# Altium PCB SZ.PcbDoc
Units mil, origin at the board's own origin, x right, y up, seen from the top; angles counter-clockwise.
Board outline 1290 x 1133 mil, 2 copper layers (Top Layer, Bottom Layer); 47 components, 54 nets, 167 pads, 31 vias.
Unrouted connection lines stored in the file: 6.
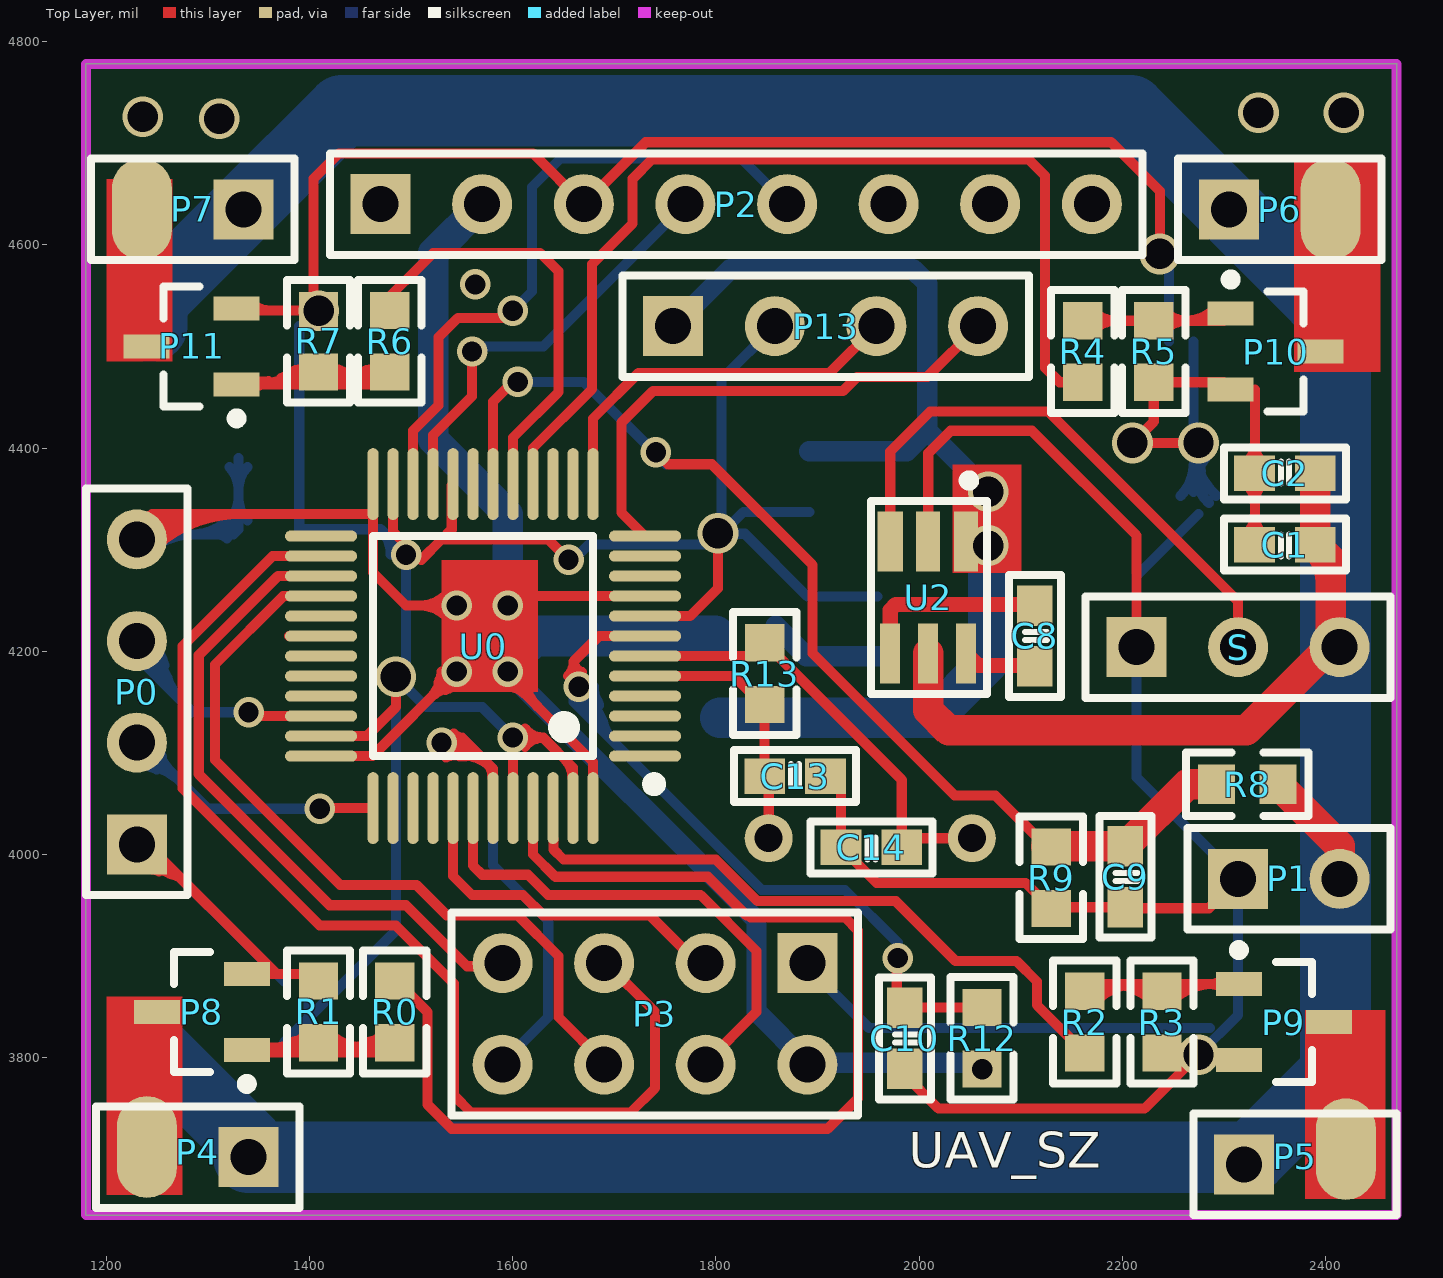
[diagram p0: Top Layer view]
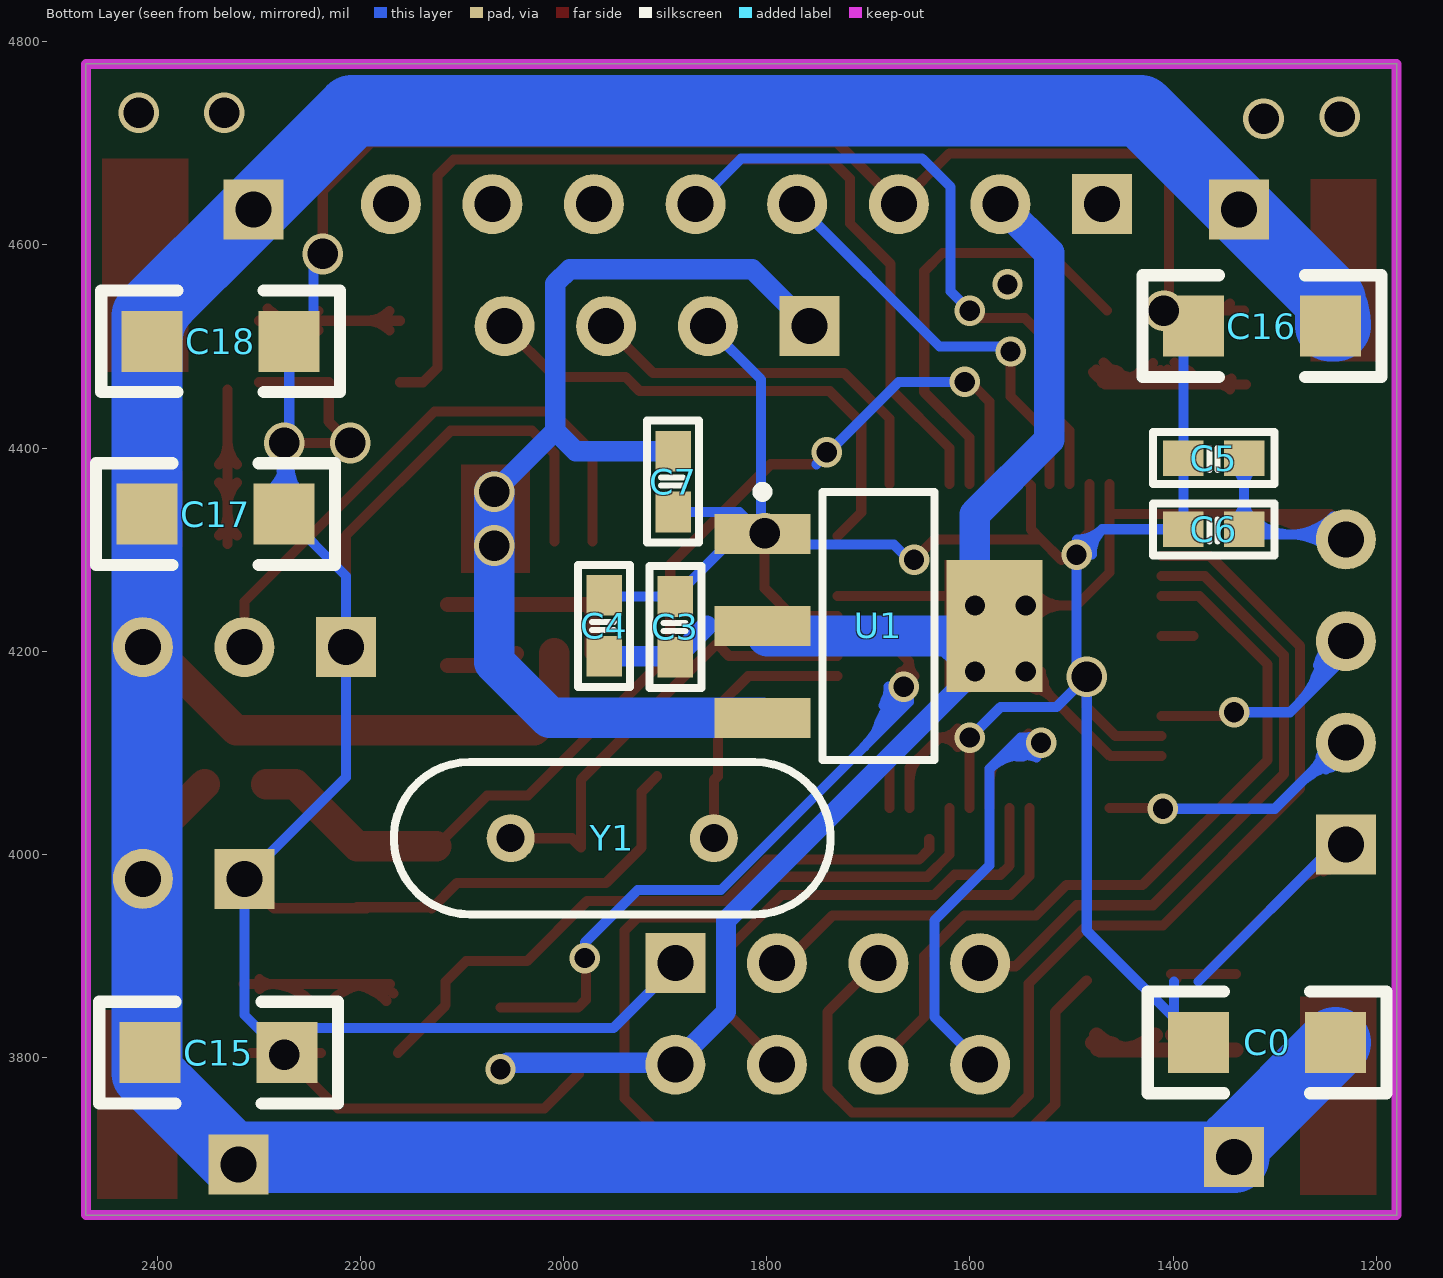
[diagram p1: Bottom Layer view, seen from below]
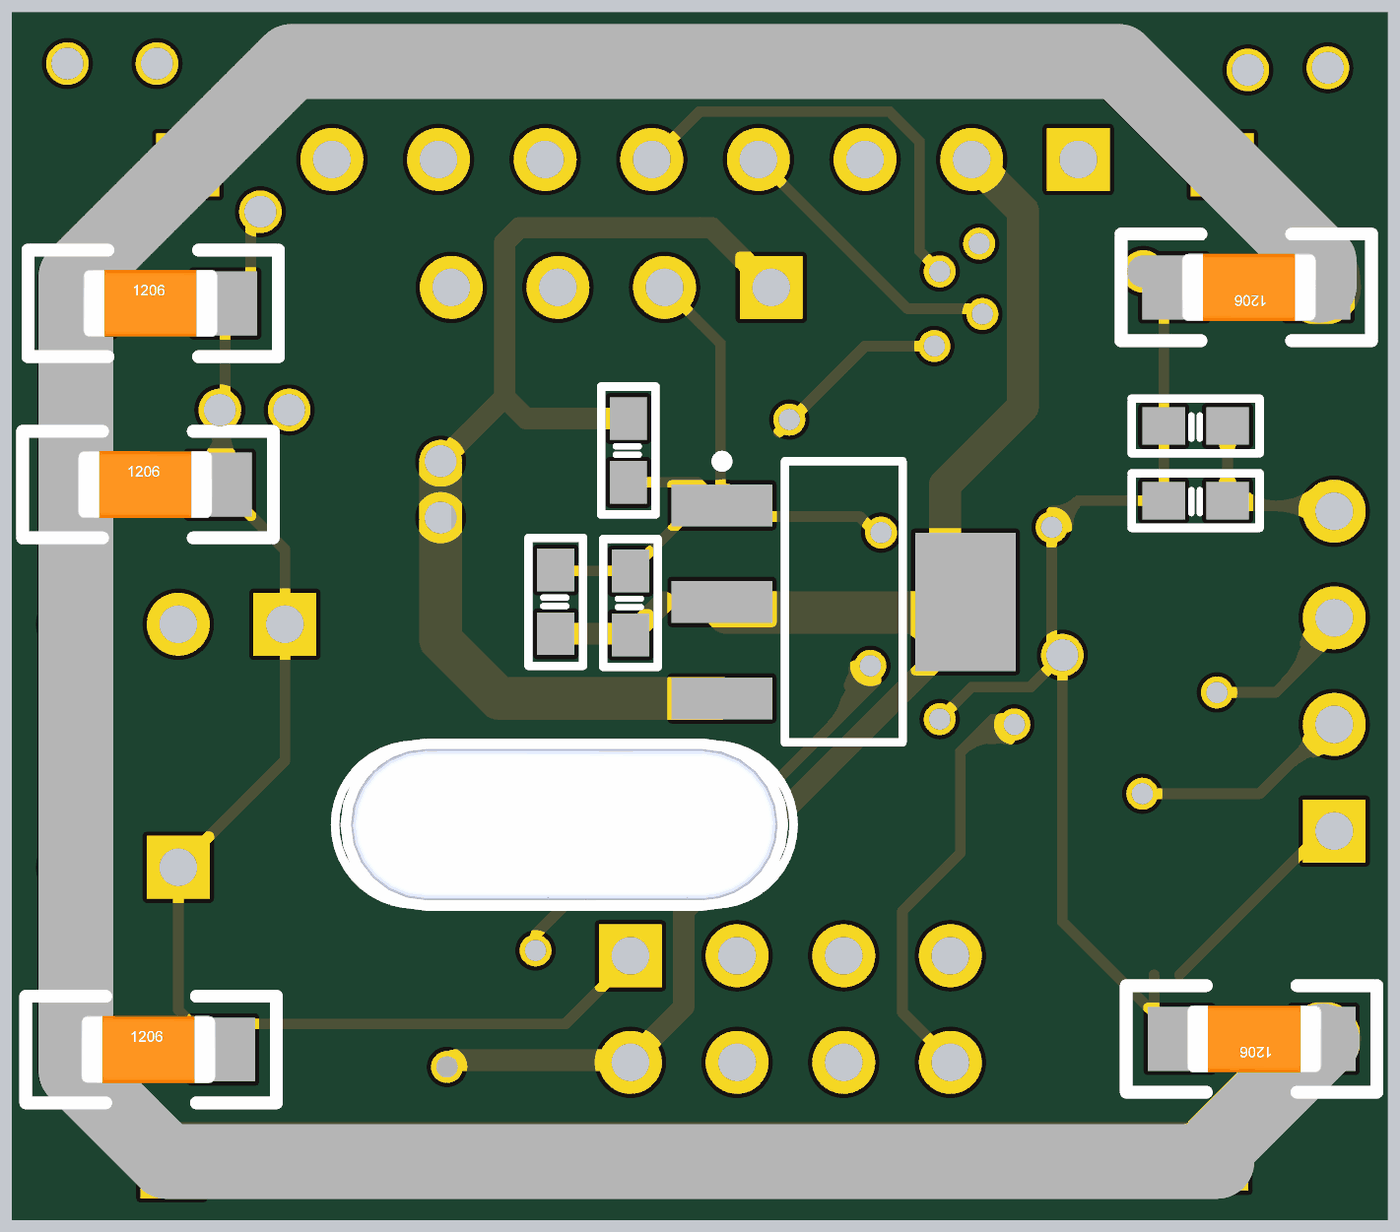
[diagram p2: 3D render of the assembled board from below, using the file's embedded part models]

## Layer stack, top to bottom
Top Solder: solder mask 0.4, Solder Resist, Dk 3.5
Top Layer: signal copper 1.4
Dielectric 1: dielectric 12.6, FR-4, Dk 4.8
Bottom Layer: signal copper 1.4
Bottom Solder: solder mask 0.4, Solder Resist, Dk 3.5

## Board outline
1180,3645 1180,4778 2470,4778 2470,3645

## Design rules (kind name [scope] priority, off if disabled: settings)
Clearance [All] p1: gap=6
HoleToHoleClearance [All] p1: gap=0 allowstackedmicrovias=TRUE
MinimumSolderMaskSliver [All] p1: minsoldermaskwidth=0
NetAntennae [All] p1: netantennaetolerance=5
PolygonConnect [All] p1: connectstyle=Relief reliefconductorwidth=10 reliefentries=4 polygonreliefangle="90 Angle" airgapwidth=10
RoutingVias [All] p1: holewidth=28 width=50 viastyle="Through Hole" minholewidth=28 minwidth=50 maxholewidth=28 maxwidth=50
SilkToSilkClearance [All] p1: silktosilkclearance=0
SilkToSolderMaskClearance [IsPad] p1: minsilkscreentomaskgap=0 clearancetoexposedcopper=FALSE
SolderMaskExpansion [All] p1: expansion=4
Width [All] p1: maxlimit=100 minlimit=10 preferedwidth=10
24 further rules are at their usual default settings.

## Classes and differential pairs
component class SZ: C0 C1 C2 C5 C6 C7 C8 C9 C10 C15 C16 C17 C18 P0 P1 P2 P3 P5 P6 P7 P8 P9 P10 P11 R0 R1 R2 R4 R6 R7 R8 R9 R13 S U0 U1 U2 Y1

## Components (designator, comment, footprint, x,y, rotation, side; value= is the part's Value field where it differs from the comment)
C0 "Cap Pol" 1206C 1305,3815 r0 bottom
C1 "104" C0603 2360,4305 r0 top
C2 "Cap" C0603 2360,4375 r180 top
C3 "Cap" C0603 1890,4224 r270 bottom
C4 "Cap" C0603 1960,4225 r270 bottom
C5 "Cap" C0603 1360,4390 r180 bottom
C6 "Cap" C0603 1360,4320 r180 bottom
C7 "Cap" C0603 1892,4367 r270 bottom
C8 "Cap" C0603 2114,4215 r90 top
C9 "Cap" C0603 2203,3978 r90 top
C10 "Cap" C0603 1986,3819 r90 top
C13 "20p" C0603 1878,4077 r180 top
C14 "20p" C0603 1953,4007 r0 top
C15 "Cap Pol" 1206C 2342,3805 r180 bottom
C16 "Cap Pol" 1206C 1310,4520 r0 bottom
C17 "Cap Pol" 1206C 2345,4335 r180 bottom
C18 "Cap Pol" 1206C 2340,4505 r180 bottom
P0 "Header 4" HDR1X4 1230,4010 r90 top
P1 "POWER" HDR1X2#1 2314,3976 r0 top
P2 "GY-86" HDR1X8 1470,4640 r0 top
P3 "NRF24L01" HDR2X4 1890,3893 r180 top
P4 "Header 2" HDR1X2#2 1340,3702 r180 top
P5 "Header 2" HDR1X2#3 2320,3695 r0 top
P6 "Header 2" HDR1X2#4 2305,4635 r0 top
P7 "Header 2" HDR1X2#4 1335,4635 r180 top
P8 "SI2302" SOT-23B_N 1294,3845 r180 top
P9 "SI2302" SOT-23B_N 2359,3835 r0 top
P10 "SI2302" SOT-23B_N 2351,4495 r0 top
P11 "SI2302" SOT-23B_N 1284,4500 r180 top
P13 "Comment" HDR1X4 1758,4520 r0 top
R0 "1k" 0603_R 1484,3845 r270 top
R1 "10K" 0603_R 1409,3845 r270 top
R2 "Res1" 0603_R 2163,3835 r90 top
R3 "Res1" 0603_R 2239,3835 r90 top
R4 "Res1" 0603_R 2161,4495 r270 top
R5 "Res1" 0603_R 2231,4495 r90 top
R6 "Res1" 0603_R 1479,4505 r90 top
R7 "Res1" 0603_R 1409,4505 r270 top
R8 "Res1" 0603_R 2323,4069 r0 top
R9 "Res1" 0603_R 2130,3977 r90 top
R12 "Res" 0603_R 2062,3819 r270 top
R13 "Res2" 0603_R 1848,4178 r270 top
S "HEADER 3" HDR1X3 2214,4204 r0 top
U0 "Component_1" LQFP-48_7x7x05P 1570.83,4205 r90 top
U1 "AMS1117" SOT223_N 1690,4225 r180 bottom
U2 "LTC3200" SOT-23-6 2009,4253 r180 top
Y1 "8M" XTAL-RAD-0.2 1952,4016 r180 bottom

## Footprints (in the part's own frame and the unit in brackets; to place one, negate y for a bottom-side part, rotate by r counter-clockwise, add the part's x,y. Pads: shape width x height; smd on the part's side, far side on the other; paste and mask are expansions set on the pad)
0603_R [mm]
  rect 0.93x0.98 smd: 1(-0.77,0) 2(0.77,0)
  silkscreen extent -1.53,-0.79 1.54,0.79, body extent -0.85,-0.4 0.85,0.4, height 0.56
1206C [mil]
  rect 60x60 smd: 1(-65,0) 2(70,0)
  silkscreen extent -115,-50 120,50, body extent -63,-31 63,31, height 39
C0603 [mil]
  rect 40x35 smd: 1(-29.92,0)
  rect 40x35 smd mask+4: 2(29.92,0)
  silkscreen extent -60,-26 60,26
HDR1X2#1 [mm] "Connector; Header; 2 Position"
  rect 1.5x1.5 hole 0.9: 1(0,0)
  round 1.5 hole 0.9: 2(2.54,0)
  silkscreen extent -1.27,-1.27 3.81,1.27
HDR1X2#2 [mm] "Connector; Header; 2 Position"
  rect 1.5x1.5 hole 0.9: 1(0,0)
  oval 1.5x2.54 smd: 2(2.54,-0.254)
  silkscreen extent -1.27,-1.27 3.81,1.27
HDR1X2#3 [mm] "Connector; Header; 2 Position"
  rect 1.5x1.5 hole 0.9: 1(0,0)
  oval 1.5x2.54 smd: 2(2.54,0.381)
  silkscreen extent -1.27,-1.27 3.81,1.27
HDR1X2#4 [mm] "Connector; Header; 2 Position"
  rect 1.5x1.5 hole 0.9: 1(0,0)
  oval 1.5x2.54 smd: 2(2.54,0)
  silkscreen extent -1.27,-1.27 3.81,1.27
HDR1X3 [mm] "Connector; Header; 3 Position"
  rect 1.5x1.5 hole 0.9: 1(0,0)
  round 1.5 hole 0.9: 2(2.54,0) 3(5.08,0)
  silkscreen extent -1.27,-1.27 6.35,1.27
HDR1X4 [mm]
  rect 1.5x1.5 hole 0.9: 1(0,0)
  round 1.5 hole 0.9: 2(2.54,0) 3(5.08,0) 4(7.62,0)
  silkscreen extent -1.27,-1.27 8.89,1.27
HDR1X8 [mm] "Connector; Header; 8 Position"
  rect 1.5x1.5 hole 0.9: 1(0,0)
  round 1.5 hole 0.9: 2(2.54,0) 3(5.08,0) 4(7.62,0) 5(10.16,0) 6(12.7,0) 7(15.24,0) 8(17.78,0)
  silkscreen extent -1.27,-1.27 19.05,1.27
HDR2X4 [mm] "Connector; Header; 4x2 Position"
  rect 1.5x1.5 hole 0.9: 1(0,0)
  round 1.5 hole 0.9: 2(0,2.54) 3(2.54,0) 4(2.54,2.54) 5(5.08,0) 6(5.08,2.54) 7(7.62,0) 8(7.62,2.54)
  silkscreen extent -1.27,-1.27 8.89,3.81
LQFP-48_7x7x05P [mm]
  oval 0.28x1.8 smd mask+0.051: 1(-2.75,-4.05) 2(-2.25,-4.05) 3(-1.75,-4.05) 4(-1.25,-4.05) 5(-0.75,-4.05) 6(-0.25,-4.05) 7(0.25,-4.05) 8(0.75,-4.05) 9(1.25,-4.05) 10(1.75,-4.05) 11(2.25,-4.05) 12(2.75,-4.05) 25(2.75,4.05) 26(2.25,4.05) 27(1.75,4.05) 28(1.25,4.05) 29(0.75,4.05) 30(0.25,4.05) 31(-0.25,4.05) 32(-0.75,4.05) 33(-1.25,4.05) 34(-1.75,4.05) 35(-2.25,4.05) 36(-2.75,4.05)
  oval 1.8x0.28 smd mask+0.051: 13(4.05,-2.75) 14(4.05,-2.25) 15(4.05,-1.75) 16(4.05,-1.25) 17(4.05,-0.75) 18(4.05,-0.25) 19(4.05,0.25) 20(4.05,0.75) 21(4.05,1.25) 22(4.05,1.75) 23(4.05,2.25) 24(4.05,2.75) 37(-4.05,2.75) 38(-4.05,2.25) 39(-4.05,1.75) 40(-4.05,1.25) 41(-4.05,0.75) 42(-4.05,0.25) 43(-4.05,-0.25) 44(-4.05,-0.75) 45(-4.05,-1.25) 46(-4.05,-1.75) 47(-4.05,-2.25) 48(-4.05,-2.75)
  silkscreen extent -3.6,-4.43 2.75,2.75
SOT223_N [mm] "SOT223, 4-Leads, Body 6.5x3.5mm, Pitch 2.3mm, Lead Span 7mm, IPC Medium Density"
  rect 2.4x1 smd: 1(-2.9,2.3) 2(-2.9,0) 3(-2.9,-2.3)
  rect 2.4x3.3 smd: 4(2.9,0)
  silkscreen extent -3.03,-3.35 1.4,3.47, body extent -1.85,-3.35 1.85,3.35, height 1.7
SOT-23-6 [mm]
  rect 0.6x1.5 smd: 1(-0.95,-1.4) 2(0,-1.4)
  rect 0.63x1.5 smd: 3(0.95,-1.4)
  rect 0.5x1.5 smd: 4(0.95,1.4) 5(0,1.4) 6(-0.95,1.4)
  silkscreen extent -1.47,-3.05 1.43,2.41
SOT-23B_N [mm] "SOT23, 3-Leads, Body 2.9x1.3mm, Pitch 0.95mm, Lead Span 2.4mm, IPC Medium Density"
  rect 1.15x0.6 smd: 1(-1.125,0.95) 2(-1.125,-0.95) 3(1.125,0)
  silkscreen extent -1.25,-1.5 0.7,1.92, body extent -0.7,-1.5 0.7,1.5, height 1.14
XTAL-RAD-0.2 [mm] "Radial Cap, Thru-Hole; 2 Leads; 0.2 in Pin Spacing"
  round 1.2 hole 0.7: 1(-2.54,0) 2(2.54,0)
  silkscreen extent -5.46,-1.91 5.46,1.91, body extent -5.33,-2.05 5.33,2.05, height 3.22

## Part data
C0 C15 C16 C17 C18: "极性电解电容"
C1 C13 C14: library part CAP, "Capacitor"
C2 C10: "贴片电容"
C3 C4 C5 C6 C7 C9: "无极性电容"
C8: "Capacitor"
P0: "Header, 4-Pin"
P1: library part "Header 2", "Header, 2-Pin"
P2: library part "Header 8", "Header, 8-Pin"
P3: library part "Header 4X2", "Header, 4-Pin, Dual row"
P4 P5 P6 P7: "Header, 2-Pin"
R0 R1: library part Res1, "贴片电阻"
R2 R3 R4 R5 R6 R7 R8 R9 R12: "贴片电阻"
R13: "Resistor"
Y1: library part XTAL

## Via types
v1: diameter 30, hole 20, Top Layer to Bottom Layer, 18 vias
v2: diameter 40, hole 30, Top Layer to Bottom Layer, 13 vias

## Nets (pads, with @x,y where several pads share a name; then routed paths per layer and width w, separated by ;. In a path a pad name is that pad's centre, name@x,y a point inside that pad or via, vN(x,y) a via of type N, cw(c..) or ccw(c..) an arc to the next point about the centre after c; other vN are vias at no path point)
3V3: C3.2 C4.2 C5.2 C6.2 P0.4 P2.2 P3.2 R12.2 U0.9 U0.24 U0.36 U0.48 U1.2 U1.4 | length 4426.8
  Top Layer w10: P0.4@1225,4315 1245,4335 U0.24@1462.56,4335 ; P0.4@1235.49,4325.05 ccw(c1252.07,4340.94) 1263.55,4321.05 ; P0.4@1241.47,4333.18 ccw(c1252.96,4345.87) 1261.52,4331.04 ccw(c1273.8,4309.78) P0.4@1249.39,4312.39 ; P0.4@1242.71,4331.97 ccw(c1261.54,4350.02) 1274.59,4327.43 ; U0.36 1461.73,4096.73 v1(1545,4180) ; U0.24 U0.24@1462.56,4335 ; 1527.03,4168.92 cw(c1548.44,4163.18) v1@1544,4184.9 ; 1533.92,4162.03 ccw(c1528.18,4183.44) v1@1549.9,4179 ; v1(1545,4245) 1495,4245 1462.56,4277.44 U0.24@1462.56,4335 ; v1(1595,4180) 1590,4180 1679.09,4090.91 U0.48 ; v1@1596.52,4184.76 cw(c1588.73,4160.34) 1613.49,4166.98 ; v1@1604.21,4254.21 U0.9 ; 1508.79,4245 ccw(c1508.79,4281.21) 1534.39,4255.61 cw(c1508.79,4281.21) 1508.79,4245 ; 1508.79,4245 cw(c1508.79,4208.79) 1534.39,4234.39 ccw(c1508.79,4208.79) 1508.79,4245 ; 1519.39,4154.39 ccw(c1493.79,4180) 1530,4180 cw(c1493.79,4180) 1519.39,4154.39 ; 1519.39,4154.39 cw(c1545,4128.79) 1545,4165 ccw(c1545,4128.79) 1519.39,4154.39 ; P0.4@1221.13,4318.87 cw(c1260.07,4279.93) 1260.07,4335 ccw(c1260.07,4279.93) P0.4@1221.13,4318.87 ; P0.4@1228.2,4311.8 cw(c1284.21,4255.79) 1284.21,4335 ccw(c1284.21,4255.79) P0.4@1228.2,4311.8 ; P0.4@1235.27,4304.73 cw(c1308.36,4231.64) 1308.36,4335 ccw(c1308.36,4231.64) P0.4@1235.27,4304.73 ; P0.4@1242.34,4297.66 cw(c1332.5,4207.5) 1332.5,4335 ccw(c1332.5,4207.5) P0.4@1242.34,4297.66 ; 1595,4165 cw(c1595,4140.86) 1612.07,4157.93 ccw(c1595,4140.86) 1595,4165 ; v1@1600,4180 ccw(c1624.14,4180) 1607.07,4162.93 cw(c1624.14,4180) v1@1600,4180 ; 1610,4180 ccw(c1658.28,4180) 1624.14,4145.86 cw(c1658.28,4180) 1610,4180
  Top Layer w15: v1(1595,4245) v1@1604.21,4254.21
  Bottom Layer w10: P0.4@1225,4315 1325.08,4315 C6.2 C5.2 ; 1260.07,4315 ccw(c1260.07,4279.93) 1235.27,4304.73 cw(c1260.07,4279.93) 1260.07,4315 ; 1260.07,4315 cw(c1260.07,4350.07) 1235.27,4325.27 ccw(c1260.07,4350.07) 1260.07,4315 ; 1284.21,4315 ccw(c1284.21,4255.79) 1242.34,4297.66 cw(c1284.21,4255.79) 1284.21,4315 ; 1284.21,4315 cw(c1284.21,4374.21) 1242.34,4332.34 ccw(c1284.21,4374.21) 1284.21,4315 ; 1309.47,4315 ccw(c1309.47,4338.11) 1325.81,4321.77 cw(c1309.47,4338.11) 1309.47,4315 ; 1309.47,4315 cw(c1309.47,4301.89) 1318.74,4311.16 ccw(c1309.47,4301.89) 1309.47,4315 ; 1330.08,4350.18 ccw(c1360.26,4350.18) 1338.92,4328.84 cw(c1360.26,4350.18) 1330.08,4350.18 ; 1330.08,4350.18 cw(c1299.9,4350.18) 1321.24,4328.84 ccw(c1299.9,4350.18) 1330.08,4350.18 ; 1330.08,4359.82 ccw(c1299.9,4359.82) 1321.24,4381.16 cw(c1299.9,4359.82) 1330.08,4359.82 ; 1330.08,4359.82 cw(c1360.26,4359.82) 1338.92,4381.16 ccw(c1360.26,4359.82) 1330.08,4359.82 ; 1285.33,4315 ccw(c1285.33,4362.25) 1318.74,4328.84 cw(c1285.33,4362.25) 1285.33,4315
  Bottom Layer w20: U1.4@1563.13,4206.03 ccw(c1590.27,4220.47) U1.4@1593.84,4189.93 ; v1(1595,4180) 1840,3935 1840,3845 1890,3795 v1@2055.68,3795 ; 1858.79,4225 1888.71,4195.08 C4.2
  Bottom Layer w30: P2.2 1522,4592 1522,4408 1595,4335 v1(1595,4245)
  Bottom Layer w40: U1.4@1570.83,4215 U1.2@1799.17,4215 ; v1(1595,4180) cw(c1648.04,4165.79) 1620.58,4213.34 ccw(c1648.04,4165.79) v1(1595,4180)
  other v1: 2062,3788.68
5V: C7.1 P13.1 U1.3 U2.1 | length 1087.6
  Bottom Layer w20: P13.1 1814,4576 1994,4576 2008,4562 2008,4417 ; C7.1 1987.92,4396.92 2008,4417 ; v2(2068,4357) 2008,4417
  Bottom Layer w40: U1.3 2013.45,4134.45 2068,4189 v2(2068,4304) v2(2068,4357)
GND: C0.2 C1.1 C2.2 C3.1 C4.1 C5.1 C6.1 C7.2 C9.1 C10.1 C13.1 C14.1 C15.2 C16.2 C17.2 C18.2 P0.1 P1.1 P2.3 P3.1 P8.2 P9.2 P10.2 P11.2 P13.2 R1.1 R3.1 R5.1 R7.1 R9.1 S.1 U0.8 U0.20 U0.23 U0.35 U0.44 U0.47 U1.1 U2.2 | length 8145.4
  Top Layer w10: P0.1@1219.82,4013.23 ccw(c1263.99,4028.36) P0.1@1251.91,3983.26 ; P0.1@1225,4015 1235,4015 1367.6,3882.4 ; P0.1@1229.28,4016.47 ccw(c1285.39,4035.7) 1270.04,3978.4 ; P0.1@1229.48,4015.66 ccw(c1255.46,4019.5) P0.1@1248.67,3994.13 ; P11.2@1330.38,4535.31 R7.1 ; P8.2 R1.1@1401.91,3882.4 ; R1.1@1396.76,3877.24 R1.1@1398.69,3875.31 ; R7.1@1404,4535.31 1404,4665 1429,4690 1620,4690 P2.3 1731,4701 2189,4701 2237,4653 v2(2237,4591) ; U0.35 1456.42,4116.42 1485,4145 v2(1485,4175) ; U0.23 1482.24,4317.76 1510,4290 1530,4310 ; U0.20 1540,4363.15 1540,4320 1530,4310 ; v1(1600,4115) 1630,4115 ; U0.44 v1@1600.35,4114.65 ; v1(1655,4290) 1635,4310 1530,4310 ; U0.47 1659.41,4085.59 1630,4115 ; U0.8 1774.53,4234.53 1802,4262 v2(1802,4316) ; C13.1 1923.08,4061.84 C14.1 1958.08,3972 2104.69,3972 R9.1 ; C10.1@1985,3784 2019,3750 2222,3750 v2(2275,3803) ; U2.2 2009,4395 2031,4417 2111,4417 2214,4314 S.1 S.1@2194.69,4184.69 ; R9.1@2132.39,3948.08 C9.1 ; C9.1@2194,3947.08 2285.08,3947.08 P1.1 ; R3.1 P9.2@2307.62,3804.69 ; v2(2275,4405) v2(2210,4405) 2231,4426 R5.1 P10.2@2299.62,4464.69 ; C1.1@2330.71,4305.63 2330.71,4457.6 ; 1630,4115 ccw(c1630,4092.5) 1612,4106 cw(c1630,4092.5) 1630,4115 ; 1630,4115 cw(c1630,4137.5) 1612,4124 ccw(c1630,4137.5) 1630,4115 ; P11.2@1343.93,4542.22 ccw(c1360.6,4558.88) 1360.6,4535.31 cw(c1360.6,4558.88) P11.2@1343.93,4542.22 ; 1651.38,4093.62 cw(c1633.23,4075.47) 1658.9,4075.47 ccw(c1633.23,4075.47) 1651.38,4093.62 ; C1.1@2321.24,4313.84 ccw(c2298.38,4336.7) 2330.71,4336.7 cw(c2298.38,4336.7) C1.1@2321.24,4313.84 ; C2.2@2321.24,4366.16 cw(c2298.38,4343.3) 2330.71,4343.3 ccw(c2298.38,4343.3) C2.2@2321.24,4366.16 ; C2.2@2321.24,4383.84 ccw(c2298.38,4406.7) 2330.71,4406.7 cw(c2298.38,4406.7) C2.2@2321.24,4383.84 ; 2330.71,4333.66 ccw(c2358.74,4333.66) 2338.92,4313.84 cw(c2358.74,4333.66) 2330.71,4333.66 ; 2330.71,4346.34 cw(c2358.74,4346.34) 2338.92,4366.16 ccw(c2358.74,4346.34) 2330.71,4346.34 ; 2330.71,4403.66 ccw(c2358.74,4403.66) 2338.92,4383.84 cw(c2358.74,4403.66) 2330.71,4403.66
  Bottom Layer w10: P0.1@1235,4015 1375,3875 ; C0.2 1485,3925 v2(1485,4175) ; C16.2@1389.92,4520 C5.1 C6.1 1470,4320 ; C0.2@1399,3815 1399,3875 ; v1(1600,4115) 1570,4145 1515,4145 v2(1485,4175) ; v1(1655,4290) 1655,4285 1675,4305 1795,4305 U1.1@1805.55,4315.55 ; P13.2 1805.55,4467.55 U1.1@1805.55,4315.55 ; P3.1@1890,3890 1951,3829 C15.2@2286,3829 ; C7.2 1827.08,4337.08 U1.1@1805.55,4315.55 ; C4.1@1959,4253.92 C3.1 1828.37,4315.55 U1.1@1805.55,4315.55 ; v2(2237,4591) 2246,4582 C18.2@2246,4505 ; v2@2270,4410 C18.2 ; v2(2275,3803) 2314,3842 P1.1 2214,4076 S.1 2214,4274 C17.2 ; 1470,4320 ccw(c1494.16,4344.15) 1494.74,4310 cw(c1494.16,4344.15) 1470,4320 ; 1470,4320 cw(c1445.85,4295.84) 1480,4295.26 ccw(c1445.85,4295.84) 1470,4320 ; 1470,4320 v1(1495,4295) 1495,4185 v2(1485,4175) ; 2277.43,4377.25 cw(c2290.85,4380.85) v2@2283.23,4392.46 ; 2277.43,4377.25 cw(c2290.85,4380.85) v2@2283.23,4392.46 ; 2277.43,4377.25 cw(c2290.85,4380.85) v2@2283.23,4392.46 ; C17.2@2257.32,4352.68 ccw(c2226.71,4383.28) 2270,4383.28 cw(c2226.71,4383.28) C17.2@2257.32,4352.68 ; C17.2@2270,4356.71 cw(c2323.29,4356.71) 2285.61,4394.39 ccw(c2323.29,4356.71) C17.2@2270,4356.71 ; 2270,4381.66 ccw(c2319.44,4381.66) 2285.34,4345.86 cw(c2319.44,4381.66) 2270,4381.66 ; v2@2270,4405 ccw(c2341.66,4405) 2292.24,4353.1 cw(c2341.66,4405) v2@2270,4405
  other v1: 1563,4561
  other v2: 1409,4535 1311,4724 1236,4726 2334,4730 2418,4730
NetC8_1: C8.1 U2.6 | length 72.5
  Top Layer w15: U2.6 2058.2,4186.08 C8.1@2114,4186.08
NetC8_2: C8.2 U2.4 | length 187.3
  Top Layer w15: U2.4 1971.6,4240.6 1976.92,4245.92 C8.2@2114,4245.92
NetC19_2: P4.2 P8.3
NetC20_1: P5.2 P9.3
NetC21_1: P6.2 P10.3
NetC22_1: P7.2 P11.3
NetP8_1: P8.1 R0.2 R1.2 | length 416.8
  Top Layer w15: P8.1 1471.91,3807.6 R0.2@1479,3814.68 ; 1383.05,3812.33 cw(c1389.08,3801.89) R1.2@1399.06,3808.64 ; 1458.05,3812.33 cw(c1464.08,3801.89) R0.2@1474.06,3808.64 ; 1364.82,3807.6 ccw(c1364.82,3857.88) 1400.37,3822.33 cw(c1364.82,3857.88) 1364.82,3807.6 ; R1.2@1417.63,3822.33 ccw(c1453.18,3857.88) 1453.18,3807.6 cw(c1453.18,3857.88) R1.2@1417.63,3822.33 ; 1439.82,3807.6 ccw(c1439.82,3857.88) 1475.37,3822.33 cw(c1439.82,3857.88) 1439.82,3807.6
NetP9_1: P9.1 R2.2 R3.2 | length 511.2
  Top Layer w10: R2.2@2171.09,3872.4 P9.1 ; 2287.44,3872.4 ccw(c2287.44,3888.84) 2299.07,3877.22 cw(c2287.44,3888.84) 2287.44,3872.4 ; 2287.44,3872.4 cw(c2287.44,3855.96) 2299.07,3867.59 ccw(c2287.44,3855.96) 2287.44,3872.4 ; R2.2@2167.32,3862.98 cw(c2190.08,3840.22) 2190.08,3872.4 ccw(c2190.08,3840.22) R2.2@2167.32,3862.98 ; R2.2@2174.39,3855.91 cw(c2214.22,3816.08) 2214.22,3872.4 ccw(c2214.22,3816.08) R2.2@2174.39,3855.91 ; 2188.78,3872.4 cw(c2188.78,3816.08) 2228.61,3855.91 ccw(c2188.78,3816.08) 2188.78,3872.4 ; R3.2@2249.39,3855.91 cw(c2289.22,3816.08) 2289.22,3872.4 ccw(c2289.22,3816.08) R3.2@2249.39,3855.91
NetP10_1: P10.1 R4.1 R5.2 | length 372.4
  Top Layer w10: R4.1 P10.1@2299.62,4525.31 ; 2262.33,4525.31 ccw(c2262.33,4565.95) P10.1@2291.07,4537.22 ; 2194.11,4525.31 ccw(c2194.11,4493.19) 2171.39,4515.91 cw(c2194.11,4493.19) 2194.11,4525.31 ; 2194.11,4525.31 cw(c2194.11,4557.44) 2171.39,4534.72 ccw(c2194.11,4557.44) 2194.11,4525.31 ; 2264.11,4525.31 ccw(c2264.11,4493.19) 2241.39,4515.91 cw(c2264.11,4493.19) 2264.11,4525.31 ; 2264.11,4525.31 cw(c2264.11,4557.44) 2241.39,4534.72 ccw(c2264.11,4557.44) 2264.11,4525.31
NetP11_1: P11.1 R6.1 R7.2 | length 1091.1
  Top Layer w10: P11.1 R6.1@1466.91,4462.6 ; 1372.13,4468.81 cw(c1383.08,4449.86) R7.2@1398.58,4465.3 ; 1383.39,4475.31 cw(c1392.61,4459.35) R7.2@1405.67,4472.35 ; 1385.2,4465.2 cw(c1391.77,4453.82) R7.2@1399.84,4464.19 ; 1385.28,4465.24 ccw(c1374.67,4483.62) R7.2@1395.16,4478.13 ; R7.2@1412.45,4472.48 cw(c1424.18,4461.99) 1432.78,4475.18 ; R7.2@1418.77,4464.69 cw(c1424.89,4457.73) 1429.94,4465.5 cw(c1438.19,4478.16) R7.2@1423.19,4476.31 ; R7.2@1419.9,4465.82 cw(c1432.97,4454.13) 1442.54,4468.82 ; 1442.13,4468.81 cw(c1453.07,4449.86) R6.1@1468.58,4465.3 ; 1453.39,4475.31 cw(c1462.61,4459.35) R6.1@1475.67,4472.35 ; 1455.2,4465.2 cw(c1461.77,4453.82) R6.1@1469.84,4464.19 ; 1455.28,4465.24 ccw(c1444.67,4483.62) R6.1@1465.16,4478.13 ; R6.1 R6.1@1466.91,4462.6 ; P11.1@1342.68,4468.4 ccw(c1354.43,4487.57) 1359.68,4465.71 ; P11.1@1342.68,4468.4 ccw(c1354.43,4487.57) 1359.68,4465.71 ; P11.1@1342.68,4468.4 ccw(c1354.43,4487.57) 1359.68,4465.71 ; P11.1@1344.92,4459.04 cw(c1353.79,4453.6) 1351.37,4463.71 ; P11.1@1344.92,4459.04 cw(c1353.79,4453.6) 1351.37,4463.71 ; P11.1@1344.92,4459.04 cw(c1353.79,4453.6) 1351.37,4463.71 ; 1355.56,4462.6 ccw(c1355.56,4446.16) 1343.93,4457.78 cw(c1355.56,4446.16) 1355.56,4462.6 ; 1355.56,4462.6 cw(c1355.56,4479.04) 1343.93,4467.41 ccw(c1355.56,4479.04) 1355.56,4462.6 ; R6.1@1466.91,4462.6 cw(c1466.91,4525.8) 1419.89,4483.58 ccw(c1466.91,4525.8) R6.1@1466.91,4462.6 ; P11.1@1346.71,4462.6 ccw(c1346.71,4535.99) 1398.61,4484.09 cw(c1346.71,4535.99) P11.1@1346.71,4462.6 ; 1370.85,4462.6 ccw(c1370.85,4511.85) 1405.68,4477.02 cw(c1370.85,4511.85) 1370.85,4462.6 ; R7.2@1412.44,4476.89 ccw(c1444.49,4505.67) 1444.49,4462.6 cw(c1444.49,4505.67) R7.2@1412.44,4476.89 ; R7.2@1416.71,4462.6 ccw(c1416.71,4535.99) 1468.61,4484.09 cw(c1416.71,4535.99) R7.2@1416.71,4462.6 ; 1440.85,4462.6 ccw(c1440.85,4511.85) 1475.68,4477.02 cw(c1440.85,4511.85) 1440.85,4462.6
NetS_2: S.2 U2.3 | length 569.7
  Top Layer w10: U2.3 1971.6,4396.6 2011,4436 2127,4436 2314,4249 S.2
OSCIN: C13.2 R13.2 U0.5 Y1.2 | length 261.4
  Top Layer w10: U0.5 1818.21,4175.47 1848,4145.68 1848,4077.08 C13.2 1852,4073.08 Y1.2
OSCOUT: C14.2 R13.1 U0.6 Y1.1 | length 454.4
  Top Layer w10: U0.6 1836.84,4195.16 1848,4206.31 R13.1@1850,4206.31 ; R13.1 R13.1@1850,4206.31 ; Y1.1 1991.92,4016 C14.2 1982.92,4073.39 R13.1@1850,4206.31
PA0: U0.10
PA1: U0.11
PA2: P13.4 U0.12 | length 511.7
  Top Layer w10: U0.12 1707,4336.54 1707,4425 1738,4456 1925,4456 1939,4470 2008,4470 P13.4
PA3: P13.3 U0.13 | length 381.2
  Top Layer w10: U0.13 1679.09,4429.09 1724,4474 1912,4474 P13.3
PA4: U0.14
PA5: U0.15
PA6: R4.2 U0.16 | length 993.6
  Top Layer w10: U0.16 1620.04,4400.04 1678,4458 1678,4581 1718,4621 1718,4665 1737,4684 2108,4684 2124,4668 2124,4479 2138.32,4464.68 R4.2
PA7: R6.2 U0.17 | length 439
  Top Layer w10: R6.2@1465,4535.32 1521.68,4592 1627,4592 1645,4574 1645,4455 1600.35,4410.35 U0.17
PA8: U0.29
PA9: U0.30 | length 31.5
  Top Layer w10: U0.30@1379.84,4214.84 U0.30
PA10: U0.31
PA11: U0.32
PA12: U0.33
PA15: U0.38
PB0: C9.2 R8.1 R9.2 U0.18 | length 1069.7
  Top Layer w10: U0.18 1580.67,4445.67 v1@1595,4460 ; v1(1741,4396) 1753,4384 1796,4384 1895,4285 1895,4198 2035,4058 2075,4058 R9.2@2125.08,4007.92
  Top Layer w30: R9.2@2125.08,4007.92 C9.2 2264.08,4069 R8.1
  Bottom Layer w10: v1(1605,4465) 1670,4465 1751,4384
PB1: U0.19
PB3: U0.39
PB4: U0.40
PB5: P3.3 U0.41 | length 354.4
  Top Layer w10: U0.41 1541.3,3978.7 1560,3960 1610,3960 1630,3940 1735,3940 P3.3@1790,3885
PB6: P3.4 U0.42 | length 501.1
  Top Layer w10: U0.42 1560.98,3989.02 1570,3980 1615,3980 1635,3960 1785,3960 1840,3905 1840,3845 P3.4@1790,3795
PB7: P3.8 U0.43 | length 1118.9
  Top Layer w10: v1@1526.61,4106.32 ccw(c1551.94,4133.84) 1553.49,4096.48 ; v1@1540,4115 1550,4115 ; 1541.04,4099.84 cw(c1555.55,4086.49) 1554.73,4106.19 ; U0.43 1580.67,4084.33 ; 1550,4115 cw(c1550,4125) 1542,4119 ccw(c1550,4125) 1550,4115 ; 1550,4115 1580.67,4084.33 ; 1580.67,4084.33 ccw(c1548.2,4051.86) 1534.48,4095.68 cw(c1548.2,4051.86) 1580.67,4084.33 ; v1@1528.51,4114.77 cw(c1537.06,4087.44) 1557.31,4107.69 ccw(c1537.06,4087.44) v1@1528.51,4114.77 ; v1@1531.49,4105.23 cw(c1542.63,4069.65) 1568.99,4096.01 ccw(c1542.63,4069.65) v1@1531.49,4105.23 ; 1573.53,4091.47 cw(c1557.54,4075.47) 1580.16,4075.47 ccw(c1557.54,4075.47) 1573.53,4091.47
  Bottom Layer w10: v1@1526.61,4106.32 ccw(c1551.94,4133.84) 1553.49,4096.48 ; v1(1530,4110) 1535,4115 1550,4115 1580.67,4084.33 ; 1541.04,4099.84 cw(c1555.55,4086.49) 1554.73,4106.19 ; P3.8@1590,3795 1635,3840 1635,3935 1580.67,3989.33 1580.67,4084.33 ; 1580.67,4084.33 ccw(c1548.2,4051.86) 1534.48,4095.68 cw(c1548.2,4051.86) 1580.67,4084.33 ; v1@1528.51,4114.77 cw(c1537.06,4087.44) 1557.31,4107.69 ccw(c1537.06,4087.44) v1@1528.51,4114.77 ; v1@1531.49,4105.23 cw(c1542.63,4069.65) 1568.99,4096.01 ccw(c1542.63,4069.65) v1@1531.49,4105.23
PB8: R0.1 U0.45 | length 1142.8
  Top Layer w10: R0.1@1485,3876 1516,3845 1516,3754 1540,3730 1910,3730 1940,3760 1940,3925 1927,3938 1834.37,3938 1832.37,3940 1830,3940 1792,3978 1642,3978 1620.04,3999.96 U0.45
PB9: R2.1 U0.46 | length 629.6
  Top Layer w10: U0.46@1640,4015 1640,4005 1650,3995 1800,3995 1841,3954 1977,3954 2036,3895 2096,3895 2116,3875 2116,3851.69 R2.1
PB10: P2.4 U0.21 | length 416.5
  Top Layer w10: U0.21 1521.61,4412.61 1560,4451 v1(1560,4495)
  Bottom Layer w10: v1(1560,4495) 1565,4500 1630,4500 P2.4
PB11: P2.5 U0.22 | length 649.8
  Top Layer w10: U0.22 1501.93,4416.93 1527,4442 1527,4509 1546,4528 1593,4528 v1(1600,4535)
  Bottom Layer w10: v1(1600,4535) 1619,4554 1619,4657 1647,4685 1825,4685 P2.5
PB12: U0.25
PB13: P3.5 U0.26 | length 1130.3
  Top Layer w10: U0.26 1363.58,4293.58 1275,4205 1275,4065 1410,3930 1485,3930 1515,3900 1542,3873 1542,3763 1559,3746 1716,3746 1740,3770 1740,3845 P3.5@1690,3895
PB14: P3.7 U0.27 | length 646.9
  Top Layer w10: U0.27 1368.9,4273.9 1291,4196 1291,4079 1420,3950 1495,3950 1555,3890 P3.7@1590,3890
PB15: P3.6 U0.28 | length 767.8
  Top Layer w10: U0.28 1374.21,4254.21 1307,4187 1307,4093 1430,3970 1505,3970 1535,3940 1605,3940 1645,3900 1645,3840 P3.6@1690,3795
PC13: U0.2
PC14: U0.3
PC15: U0.4
RESET: C10.2 R12.1 U0.7 | length 1146.1
  Top Layer w10: v1@1660,4160 1660,4190 ; U0.7 1684.84,4214.84 1660,4190 ; v1@1978,3898 1978,3856.92 1985.61,3849.31 R12.1 ; 1660,4190 ccw(c1670.62,4190) 1668.29,4179.63 cw(c1670.62,4190) 1660,4190 ; v1@1654.39,4175.61 ccw(c1640.86,4189.14) 1660,4189.14 cw(c1640.86,4189.14) v1@1654.39,4175.61
  Bottom Layer w10: v1@1662.5,4160.67 cw(c1631.73,4107.38) 1691.17,4123.3 ; v1@1663.02,4160.41 cw(c1654.8,4141.28) 1674.91,4146.67 ; v1(1665,4165) v1@1660,4165 ; v1@1667.5,4169.33 cw(c1648.8,4136.94) 1684.92,4146.62 ; 1676.02,4142.53 cw(c1695.07,4147.64) 1677.99,4157.5 ; v1(1979,3898) 1979,3913 1927,3965 1845,3965 1660,4150 v1@1660,4165 ; v1@1660,4165 ccw(c1696.21,4165) 1670.61,4139.39 cw(c1696.21,4165) v1@1660,4165 ; v1@1670,4165 ccw(c1730.36,4165) 1687.68,4122.32 cw(c1730.36,4165) v1@1670,4165 ; 1680,4165 ccw(c1764.5,4165) 1704.75,4105.25 cw(c1764.5,4165) 1680,4165
SWCLK: P0.2 U0.37 | length 606.3
  Top Layer w10: v1@1410.55,4045.55 U0.37
  Bottom Layer w10: P0.2@1219.73,4113.54 ccw(c1260.6,4124.84) 1249.63,4083.87 ; P0.2@1225.69,4120.43 cw(c1221.32,4085.93) P0.2@1254.9,4094.93 ; P0.2@1230,4115 1300,4045 v1(1410,4045) ; P0.2@1225,4090.47 cw(c1225,4019.19) 1275.41,4069.59 ccw(c1225,4019.19) P0.2@1225,4090.47 ; P0.2@1225,4100.47 cw(c1225,4053.33) 1258.34,4086.66 ccw(c1225,4053.33) P0.2@1225,4100.47 ; P0.2@1249.53,4115 ccw(c1296.67,4115) 1263.34,4081.66 cw(c1296.67,4115) P0.2@1249.53,4115
SWIO: P0.3 U0.34 | length 738.3
  Top Layer w10: v1@1340,4136.1 U0.34
  Bottom Layer w10: P0.3@1223.3,4210.8 cw(c1198.39,4149.24) 1262.54,4166.43 ; P0.3@1223.93,4210.6 cw(c1216.61,4180.38) P0.3@1246.65,4188.43 ; P0.3@1227.05,4220.07 cw(c1207.82,4172.54) 1257.35,4185.81 ; P0.3@1230,4215 1230,4195 1285,4140 v1(1340,4140) ; P0.3@1225,4190.47 cw(c1225,4167.47) 1241.26,4183.74 ccw(c1225,4167.47) P0.3@1225,4190.47 ; P0.3@1229.53,4215 ccw(c1276.67,4215) 1243.34,4181.66 cw(c1276.67,4215) P0.3@1229.53,4215 ; P0.3@1239.53,4215 ccw(c1310.81,4215) 1260.41,4164.59 cw(c1310.81,4215) P0.3@1239.53,4215 ; P0.3@1249.53,4215 ccw(c1344.96,4215) 1277.48,4147.52 cw(c1344.96,4215) P0.3@1249.53,4215
VBAT: U0.1
VCC: C0.1 C1.2 C2.1 C15.1 C16.1 C17.1 C18.1 P1.2 P4.1 P5.1 P6.1 P7.1 R8.2 S.3 U2.5 | length 4391.5
  Top Layer w30: U2.5 2009,4142 2029,4122 2322,4122 2405,4205 2405,4289.92 C1.2 C2.1 ; R8.2 2414,4008.32 P1.2 ; C1.2@2390.65,4303.23 cw(c2356.02,4268.6) 2405,4268.6 ccw(c2356.02,4268.6) C1.2@2390.65,4303.23
  Bottom Layer w70: C0.1 1340,3715 P4.1 2327,3702 2410,3785 C17.1 2410,4530 P6.1 2208,4732 1432,4732 P7.1 1245,4545 C16.1 ; C16.1@1240,4520 cw(c1288.29,4520) 1254.14,4554.14 ccw(c1288.29,4520) C16.1@1240,4520 ; 2392.32,4547.68 cw(c2349.64,4505) 2410,4505 ccw(c2349.64,4505) 2392.32,4547.68
VCC_IN: P2.1
pads on no net: P2.6 P2.7 P2.8

## Keep-outs
Keep-Out Layer:
  the board outline again, w10

## Other copper
Top Layer:
  rectangle net NetC19_2: 1200,3665 1275,3860
  rectangle net 5V: 2033,4277 2101,4384
  rectangle net 3V3: 1530,4160 1625,4290
  rectangle net NetC22_1: 1200,4485 1265,4665
  rectangle net NetC21_1: 2369,4475 2454,4685
  rectangle net NetC20_1: 2380,3661 2459,3847

## Silkscreen, mask and mechanical layers (free items; w line width, h text height)
Top Overlay:
  text "UAV_SZ" at 1990,3680 h60
Top Paste:
  rectangle: 1200,3665 1275,3860
  rectangle: 1530,4160 1624,4290
  rectangle: 1200,4485 1265,4665
  rectangle: 2369,4475 2454,4685
  rectangle: 2380,3661 2462,3847
Bottom Paste:
  lines w70: 1241,3813 1340,3714 ; 1244,4522 1244,4544 1432,4732 2208,4732 2410,4530 2410,3785 2325,3700 1340,3700
Top Solder:
  rectangle: 1200,3665 1275,3860
  rectangle: 1531,4159 1625,4289
  rectangle: 1200,4485 1265,4665
  rectangle: 2369,4475 2454,4685
  rectangle: 2380,3661 2462,3847
Bottom Solder:
  lines w70: 1241,3814 1340,3715 1340,3700 ; 1245,4545 1335,4635 1336,4635 1433,4732 2208,4732 2411,4529 2411,3786 2325,3700 1355,3700